# Altium PCB Audio-Streamer-Mainboard.PcbDoc
Units mil, origin at the board's own origin, x right, y up, seen from the top; angles counter-clockwise.
Board outline 6000 x 4000 mil, 2 copper layers (Top Layer, Bottom Layer); 144 components, 29 nets, 532 pads, 0 vias.
Unrouted connection lines stored in the file: 181.
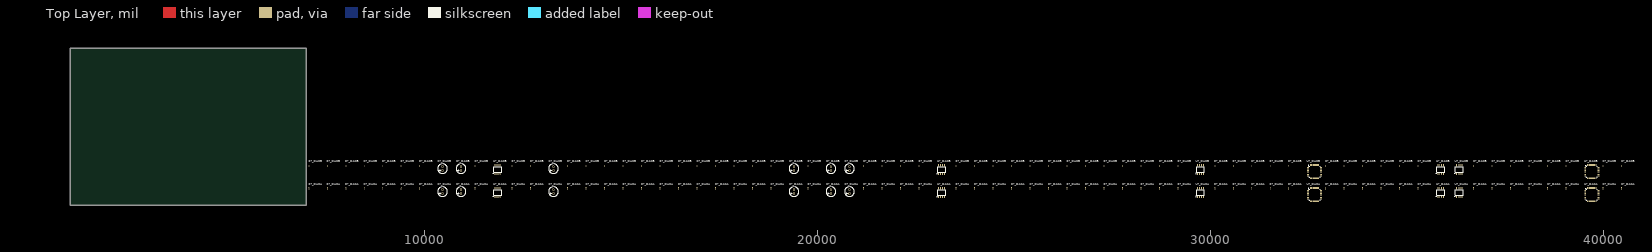
[diagram p0: Top Layer view]
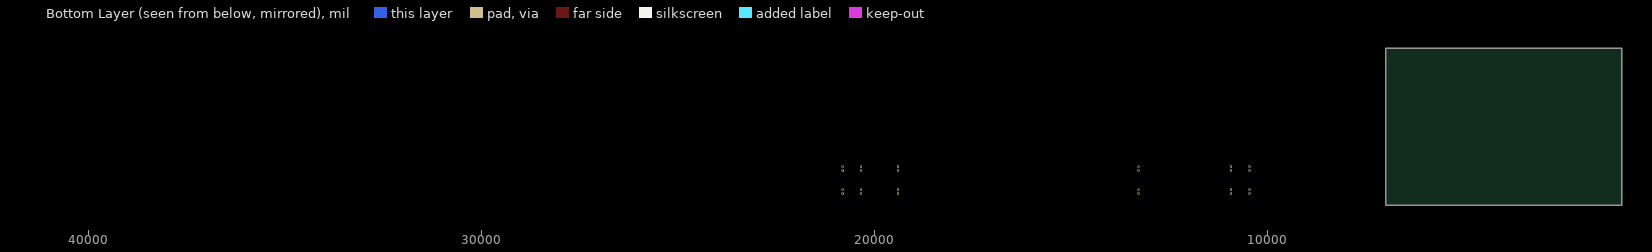
[diagram p1: Bottom Layer view, seen from below]

## Layer stack, top to bottom
Top Solder: solder mask 0.4, Solder Resist, Dk 3.5
Top Layer: signal copper 1.4
Dielectric 1: dielectric 12.6, FR-4, Dk 4.8
Bottom Layer: signal copper 1.4
Bottom Solder: solder mask 0.4, Solder Resist, Dk 3.5

## Board outline
1000,1000 7000,1000 7000,5000 1000,5000

## Design rules (kind name [scope] priority, off if disabled: settings)
Clearance [All] p1: gap=10 ignorepadtopadclearanceinfootprint=FALSE except(0: Arc-Hole Track-Hole SMDPad-Hole THPad-Hole Via-Hole Fill-Hole Poly-Hole Region-Hole Text-Hole)
PolygonConnect [All] p1: connectstyle=Relief reliefconductorwidth=10 reliefentries=4 polygonreliefangle="90 Angle" airgapwidth=10
RoomDefinition DACB [InComponentClass('DACB')] p1: confinementstyle=ConfineIn formatcopy=TRUE lockcomponents=FALSE outline 7045,1645 40855,1645 40855,2180 7045,2180
RoomDefinition DACA [InComponentClass('DACA')] p2: confinementstyle=ConfineIn formatcopy=TRUE lockcomponents=FALSE outline 7045,1060 40855,1060 40855,1595 7045,1595
RoutingVias [All] p1: holewidth=28 width=50 viastyle="Through Hole" minholewidth=28 minwidth=50 maxholewidth=28 maxwidth=50
SolderMaskExpansion [All] p1: expansion=4
Width [All] p1: maxlimit=10 minlimit=10 preferedwidth=10
30 further rules are at their usual default settings.

## Classes and differential pairs
channel class Audio-Out: DACA DACB
component class DACB: C?_DACB J?_DAC2 R?_DACB U?_DACB
component class DACA: C?_DACA J?_DAC1 R?_DACA U?_DACA

## Components (designator, comment, footprint, x,y, rotation, side; value= is the part's Value field where it differs from the comment)
C?_DACA "1µF" SMD0402CAP 39035,1440 r90 top (schematic designator C?)
C?_DACA "µF" SMD0402CAP 31045,1440 r90 top (schematic designator C?)
C?_DACA "100nF" SMD0402CAP 40445,1440 r90 top (schematic designator C?)
C?_DACA "µF" SMD0402CAP 25405,1440 r90 top (schematic designator C?)
C?_DACA "100nF" SMD0402CAP 37155,1440 r90 top (schematic designator C?)
C?_DACA "µF" SMD0402CAP 8480,1440 r90 top (schematic designator C?)
C?_DACA "µF" SMD0402CAP 16945,1440 r90 top (schematic designator C?)
C?_DACA "10µF" SMD0402CAP 37625,1440 r90 top (schematic designator C?)
C?_DACA "µF" SMD0402CAP 18825,1440 r90 top (schematic designator C?)
C?_DACA "10µF" SMD0402CAP 34805,1440 r90 top (schematic designator C?)
C?_DACA "100nF" SMD0402CAP 38095,1440 r90 top (schematic designator C?)
C?_DACA "10µF" SMD0402CAP 36685,1440 r90 top (schematic designator C?)
C?_DACA "100nF" SMD0402CAP 35275,1440 r90 top (schematic designator C?)
C?_DACA "100nF" SMD0402CAP 38565,1440 r90 top (schematic designator C?)
C?_DACA "100nF" SMD0402CAP 34335,1440 r90 top (schematic designator C?)
C?_DACA "µF" SMD0402CAP 14590,1440 r90 top (schematic designator C?)
C?_DACA "10µF" SMD0402CAP 39975,1440 r90 top (schematic designator C?)
C?_DACA "µF" SMD0402CAP 27755,1440 r90 top (schematic designator C?)
C?_DACA "100nF" SMD0402CAP 33865,1440 r90 top (schematic designator C?)
C?_DACA "100nF" SMD0402CAP 11300,1440 r90 top (schematic designator C?)
C?_DACA "µF" CAP6.3 19405,1350 r90 top (schematic designator C?)
C?_DACA "µF" CAP6.3 10470,1350 r90 top (schematic designator C?)
C?_DACA "10µF" SMD0402CAP 14120,1440 r90 top (schematic designator C?)
C?_DACA "100nF" SMD0402CAP 21175,1440 r90 top (schematic designator C?)
C?_DACA "100nF" SMD0402CAP 32925,1440 r90 top (schematic designator C?)
C?_DACA "100nF" SMD0402CAP 33395,1440 r90 top (schematic designator C?)
C?_DACA "10µF" SMD0402CAP 18355,1440 r90 top (schematic designator C?)
C?_DACA "µF" CAP6.3 13290,1350 r90 top (schematic designator C?)
C?_DACA "µF" CAP6.3 20815,1350 r90 top (schematic designator C?)
C?_DACA "µF" CAP6.3 10940,1350 r90 top (schematic designator C?)
C?_DACA "µF" CAP6.3 20345,1350 r90 top (schematic designator C?)
C?_DACB "10µF" SMD0402CAP 37625,2025 r90 top (schematic designator C?)
C?_DACB "100nF" SMD0402CAP 37155,2025 r90 top (schematic designator C?)
C?_DACB "100nF" SMD0402CAP 38095,2025 r90 top (schematic designator C?)
C?_DACB "10µF" SMD0402CAP 36685,2025 r90 top (schematic designator C?)
C?_DACB "100nF" SMD0402CAP 35275,2025 r90 top (schematic designator C?)
C?_DACB "10µF" SMD0402CAP 34805,2025 r90 top (schematic designator C?)
C?_DACB "µF" SMD0402CAP 14590,2025 r90 top (schematic designator C?)
C?_DACB "µF" SMD0402CAP 8480,2025 r90 top (schematic designator C?)
C?_DACB "µF" SMD0402CAP 16945,2025 r90 top (schematic designator C?)
C?_DACB "10µF" SMD0402CAP 39975,2025 r90 top (schematic designator C?)
C?_DACB "µF" SMD0402CAP 31045,2025 r90 top (schematic designator C?)
C?_DACB "µF" SMD0402CAP 25405,2025 r90 top (schematic designator C?)
C?_DACB "100nF" SMD0402CAP 34335,2025 r90 top (schematic designator C?)
C?_DACB "µF" SMD0402CAP 18825,2025 r90 top (schematic designator C?)
C?_DACB "100nF" SMD0402CAP 38565,2025 r90 top (schematic designator C?)
C?_DACB "100nF" SMD0402CAP 40445,2025 r90 top (schematic designator C?)
C?_DACB "µF" SMD0402CAP 27755,2025 r90 top (schematic designator C?)
C?_DACB "1µF" SMD0402CAP 39035,2025 r90 top (schematic designator C?)
C?_DACB "100nF" SMD0402CAP 32925,2025 r90 top (schematic designator C?)
C?_DACB "µF" CAP6.3 10470,1935 r90 top (schematic designator C?)
C?_DACB "100nF" SMD0402CAP 33395,2025 r90 top (schematic designator C?)
C?_DACB "µF" CAP6.3 20345,1935 r90 top (schematic designator C?)
C?_DACB "µF" CAP6.3 19405,1935 r90 top (schematic designator C?)
C?_DACB "µF" CAP6.3 13290,1935 r90 top (schematic designator C?)
C?_DACB "100nF" SMD0402CAP 11300,2025 r90 top (schematic designator C?)
C?_DACB "10µF" SMD0402CAP 18355,2025 r90 top (schematic designator C?)
C?_DACB "µF" CAP6.3 10940,1935 r90 top (schematic designator C?)
C?_DACB "µF" CAP6.3 20815,1935 r90 top (schematic designator C?)
C?_DACB "100nF" SMD0402CAP 21175,2025 r90 top (schematic designator C?)
C?_DACB "100nF" SMD0402CAP 33865,2025 r90 top (schematic designator C?)
C?_DACB "10µF" SMD0402CAP 14120,2025 r90 top (schematic designator C?)
R?_DACA "22Ω" SMD0402RES 28225,1440 r90 top (schematic designator R?)
R?_DACA "22Ω" SMD0402RES 31515,1440 r90 top (schematic designator R?)
R?_DACA "22Ω" SMD0402RES 31985,1440 r90 top (schematic designator R?)
R?_DACA "XΩ" SMD0402RES 22585,1440 r90 top (schematic designator R?)
R?_DACA "22Ω" SMD0402RES 30575,1440 r90 top (schematic designator R?)
R?_DACA "22Ω" SMD0402RES 28695,1440 r90 top (schematic designator R?)
R?_DACA "XΩ" SMD0402RES 22115,1440 r90 top (schematic designator R?)
R?_DACA "XΩ" SMD0402RES 16000,1440 r90 top (schematic designator R?)
R?_DACA "XΩ" SMD0402RES 9420,1440 r90 top (schematic designator R?)
R?_DACA "XΩ" SMD0402RES 13650,1440 r90 top (schematic designator R?)
R?_DACA "22Ω" SMD0402RES 30105,1440 r90 top (schematic designator R?)
R?_DACA "XΩ" SMD0402RES 26345,1440 r90 top (schematic designator R?)
R?_DACA "XΩ" SMD0402RES 16470,1440 r90 top (schematic designator R?)
R?_DACA "XΩ" SMD0402RES 15530,1440 r90 top (schematic designator R?)
R?_DACA "XΩ" SMD0402RES 17885,1440 r90 top (schematic designator R?)
R?_DACA "XΩ" SMD0402RES 8010,1440 r90 top (schematic designator R?)
R?_DACA "XΩ" SMD0402RES 24465,1440 r90 top (schematic designator R?)
R?_DACA "XΩ" SMD0402RES 9890,1440 r90 top (schematic designator R?)
R?_DACA "XΩ" SMD0402RES 29165,1440 r90 top (schematic designator R?)
R?_DACA "10Ω" SMD0402RES 23995,1440 r90 top (schematic designator R?)
R?_DACA "10Ω" SMD0402RES 8950,1440 r90 top (schematic designator R?)
R?_DACA "XΩ" SMD0402RES 25875,1440 r90 top (schematic designator R?)
R?_DACA "XΩ" SMD0402RES 12710,1440 r90 top (schematic designator R?)
R?_DACA "10kΩ" SMD0402RES 24935,1440 r90 top (schematic designator R?)
R?_DACA "XΩ" SMD0402RES 7070,1440 r90 top (schematic designator R?)
R?_DACA "XΩ" SMD0402RES 21645,1440 r90 top (schematic designator R?)
R?_DACA "10kΩ" SMD0402RES 27285,1440 r90 top (schematic designator R?)
R?_DACA "XΩ" SMD0402RES 12240,1440 r90 top (schematic designator R?)
R?_DACA "10kΩ" SMD0402RES 26815,1440 r90 top (schematic designator R?)
R?_DACA "XΩ" SMD0402RES 19765,1440 r90 top (schematic designator R?)
R?_DACA "10Ω" SMD0402RES 17415,1440 r90 top (schematic designator R?)
R?_DACA "XΩ" SMD0402RES 7540,1440 r90 top (schematic designator R?)
R?_DACA "10Ω" SMD0402RES 15060,1440 r90 top (schematic designator R?)
R?_DACA "10kΩ" SMD0402RES 23525,1440 r90 top (schematic designator R?)
R?_DACB "10Ω" SMD0402RES 17415,2025 r90 top (schematic designator R?)
R?_DACB "10Ω" SMD0402RES 23995,2025 r90 top (schematic designator R?)
R?_DACB "XΩ" SMD0402RES 7070,2025 r90 top (schematic designator R?)
R?_DACB "10Ω" SMD0402RES 15060,2025 r90 top (schematic designator R?)
R?_DACB "10Ω" SMD0402RES 8950,2025 r90 top (schematic designator R?)
R?_DACB "XΩ" SMD0402RES 7540,2025 r90 top (schematic designator R?)
R?_DACB "10kΩ" SMD0402RES 26815,2025 r90 top (schematic designator R?)
R?_DACB "10kΩ" SMD0402RES 27285,2025 r90 top (schematic designator R?)
R?_DACB "XΩ" SMD0402RES 19765,2025 r90 top (schematic designator R?)
R?_DACB "XΩ" SMD0402RES 16000,2025 r90 top (schematic designator R?)
R?_DACB "XΩ" SMD0402RES 22585,2025 r90 top (schematic designator R?)
R?_DACB "10kΩ" SMD0402RES 24935,2025 r90 top (schematic designator R?)
R?_DACB "22Ω" SMD0402RES 28695,2025 r90 top (schematic designator R?)
R?_DACB "XΩ" SMD0402RES 13650,2025 r90 top (schematic designator R?)
R?_DACB "22Ω" SMD0402RES 30105,2025 r90 top (schematic designator R?)
R?_DACB "XΩ" SMD0402RES 12240,2025 r90 top (schematic designator R?)
R?_DACB "22Ω" SMD0402RES 31985,2025 r90 top (schematic designator R?)
R?_DACB "XΩ" SMD0402RES 16470,2025 r90 top (schematic designator R?)
R?_DACB "22Ω" SMD0402RES 28225,2025 r90 top (schematic designator R?)
R?_DACB "XΩ" SMD0402RES 22115,2025 r90 top (schematic designator R?)
R?_DACB "XΩ" SMD0402RES 21645,2025 r90 top (schematic designator R?)
R?_DACB "XΩ" SMD0402RES 25875,2025 r90 top (schematic designator R?)
R?_DACB "10kΩ" SMD0402RES 23525,2025 r90 top (schematic designator R?)
R?_DACB "XΩ" SMD0402RES 8010,2025 r90 top (schematic designator R?)
R?_DACB "XΩ" SMD0402RES 26345,2025 r90 top (schematic designator R?)
R?_DACB "22Ω" SMD0402RES 31515,2025 r90 top (schematic designator R?)
R?_DACB "22Ω" SMD0402RES 30575,2025 r90 top (schematic designator R?)
R?_DACB "XΩ" SMD0402RES 12710,2025 r90 top (schematic designator R?)
R?_DACB "XΩ" SMD0402RES 9890,2025 r90 top (schematic designator R?)
R?_DACB "XΩ" SMD0402RES 9420,2025 r90 top (schematic designator R?)
R?_DACB "XΩ" SMD0402RES 29165,2025 r90 top (schematic designator R?)
R?_DACB "XΩ" SMD0402RES 17885,2025 r90 top (schematic designator R?)
R?_DACB "XΩ" SMD0402RES 15530,2025 r90 top (schematic designator R?)
R?_DACB "XΩ" SMD0402RES 24465,2025 r90 top (schematic designator R?)
U?_DACA "OPA1612" SOIC8 29740,1330 r90 top (schematic designator U?)
U?_DACA "OPA1611" SOIC8 36320,1330 r90 top (schematic designator U?)
U?_DACA "OPA1612" SOIC8 35850,1330 r90 top (schematic designator U?)
U?_DACA "AK4493" LQFP48 32475,1380 r0 top (schematic designator U?)
U?_DACA "AK4493" LQFP48 39525,1380 r0 top (schematic designator U?)
U?_DACA "OPA1611" SOIC8 23160,1330 r90 top (schematic designator U?)
U?_DACA "OPA1612" SOIC8 11875,1330 r90 top (schematic designator U?)
U?_DACB "OPA1612" SOIC8 35850,1915 r90 top (schematic designator U?)
U?_DACB "AK4493" LQFP48 39525,1965 r0 top (schematic designator U?)
U?_DACB "OPA1612" SOIC8 11875,1915 r90 top (schematic designator U?)
U?_DACB "OPA1611" SOIC8 36320,1915 r90 top (schematic designator U?)
U?_DACB "AK4493" LQFP48 32475,1965 r0 top (schematic designator U?)
U?_DACB "OPA1612" SOIC8 29740,1915 r90 top (schematic designator U?)
U?_DACB "OPA1611" SOIC8 23160,1915 r90 top (schematic designator U?)

## Footprints (in the part's own frame and the unit in brackets; to place one, negate y for a bottom-side part, rotate by r counter-clockwise, add the part's x,y. Pads: shape width x height; smd on the part's side, far side on the other; paste and mask are expansions set on the pad)
CAP6.3 [mm] "Aluminum Electrolytic Capacitors, 6.3x11mm"
  round 1.5 hole 0.8: M(1.25,0)
  rrect50% 1.5x1.5 hole 0.8: P(-1.25,0)
  silkscreen extent -3.15,-3.15 3.15,3.15, body extent -3.15,-3.15 3.14,3.15, height 11.31
LQFP48 [mm]
  rrect50% 1.2x0.3 smd: 1(0,0) 2(0,-0.5) 3(0,-1) 4(0,-1.5) 5(0,-2) 6(0,-2.5) 7(0,-3) 8(0,-3.5) 9(0,-4) 10(0,-4.5) 11(0,-5) 12(0,-5.5) 25(8.5,-5.5) 26(8.5,-5) 27(8.5,-4.5) 28(8.5,-4) 29(8.5,-3.5) 30(8.5,-3) 31(8.5,-2.5) 32(8.5,-2) 33(8.5,-1.5) 34(8.5,-1) 35(8.5,-0.5) 36(8.5,0)
  rrect50% 0.3x1.2 smd: 13(1.5,-7) 14(2,-7) 15(2.5,-7) 16(3,-7) 17(3.5,-7) 18(4,-7) 19(4.5,-7) 20(5,-7) 21(5.5,-7) 22(6,-7) 23(6.5,-7) 24(7,-7) 37(7,1.5) 38(6.5,1.5) 39(6,1.5) 40(5.5,1.5) 41(5,1.5) 42(4.5,1.5) 43(4,1.5) 44(3.5,1.5) 45(3,1.5) 46(2.5,1.5) 47(2,1.5) 48(1.5,1.5)
  silkscreen extent 0.2,-6.25 7.75,1.3, body extent -0.25,-7.25 8.75,1.76, height 1.5
SMD0402CAP [mm]
  rrect25% 0.5x0.6 smd: 1(-0.5,0) 2(0.5,0)
  body extent -0.5,-0.25 0.5,0.25, height 0.35
SMD0402RES [mm]
  rrect25% 0.5x0.6 smd: 1(-0.5,0) 2(0.5,0)
  body extent -0.5,-0.25 0.5,0.25, height 0.35
SOIC8 [mm] "SOIC-8"
  rrect25% 1.55x0.6 smd: 1(-2.7,1.905) 2(-2.7,0.635) 3(-2.7,-0.635) 4(-2.7,-1.905) 5(2.7,-1.905) 6(2.7,-0.635) 7(2.7,0.635) 8(2.7,1.905)
  silkscreen extent -2.79,-2.54 1.78,3, body extent -3.1,-2.5 3.1,2.5, height 1.76

## Part data
C?_DACA C?_DACA C?_DACA C?_DACA C?_DACA C?_DACA C?_DACA C?_DACA C?_DACA C?_DACA C?_DACA C?_DACA C?_DACA C?_DACA C?_DACA C?_DACA C?_DACA C?_DACA C?_DACA C?_DACA C?_DACA C?_DACA C?_DACA C?_DACA C?_DACA C?_DACB C?_DACB C?_DACB C?_DACB C?_DACB C?_DACB C?_DACB C?_DACB C?_DACB C?_DACB C?_DACB C?_DACB C?_DACB C?_DACB C?_DACB C?_DACB C?_DACB C?_DACB C?_DACB C?_DACB C?_DACB C?_DACB C?_DACB C?_DACB C?_DACB: library part "Capacitor Ceramic", "Ceramic Capacitor", Voltage=V
C?_DACA C?_DACA C?_DACA C?_DACA C?_DACA C?_DACA C?_DACB C?_DACB C?_DACB C?_DACB C?_DACB C?_DACB: library part "Capacitor Electrolytic", "Elektrolytic Capacitor"
R?_DACA R?_DACA R?_DACA R?_DACA R?_DACA R?_DACA R?_DACA R?_DACA R?_DACA R?_DACA R?_DACA R?_DACA R?_DACA R?_DACA R?_DACA R?_DACA R?_DACA R?_DACA R?_DACA R?_DACA R?_DACA R?_DACA R?_DACA R?_DACA R?_DACA R?_DACA R?_DACA R?_DACA R?_DACA R?_DACA R?_DACA R?_DACA R?_DACA R?_DACA R?_DACB R?_DACB R?_DACB R?_DACB R?_DACB R?_DACB R?_DACB R?_DACB R?_DACB R?_DACB R?_DACB R?_DACB R?_DACB R?_DACB R?_DACB R?_DACB R?_DACB R?_DACB R?_DACB R?_DACB R?_DACB R?_DACB R?_DACB R?_DACB R?_DACB R?_DACB R?_DACB R?_DACB R?_DACB R?_DACB R?_DACB R?_DACB R?_DACB R?_DACB: library part Resistor, "Resistor"
U?_DACA U?_DACA U?_DACA U?_DACA U?_DACA U?_DACB U?_DACB U?_DACB U?_DACB U?_DACB: "SoundPlus Operational Amplifier"
U?_DACA U?_DACA U?_DACB U?_DACB: "32-Bit 2ch Audio DAC"

## Nets (pads, with @x,y where several pads share a name; then routed paths per layer and width w, separated by ;. In a path a pad name is that pad's centre, name@x,y a point inside that pad or via, vN(x,y) a via of type N, cw(c..) or ccw(c..) an arc to the next point about the centre after c; other vN are vias at no path point)
A+3.3V: C?_DACA.2@36685,1459.68 C?_DACA.2@37155,1459.68 C?_DACB.2@36685,2044.68 C?_DACB.2@37155,2044.68 U?_DACA.44@39662.8,1439.06 U?_DACB.44@39662.8,2024.06
A+5V: C?_DACA.2@37625,1459.68 C?_DACA.2@38095,1459.68 C?_DACA.2@39975,1459.68 C?_DACA.2@40445,1459.68 C?_DACB.2@37625,2044.68 C?_DACB.2@38095,2044.68 C?_DACB.2@39975,2044.68 C?_DACB.2@40445,2044.68 R?_DACA.1@8950,1420.32 R?_DACA.2@23995,1459.68 R?_DACB.1@8950,2005.32 R?_DACB.2@23995,2044.68 U?_DACA.27@39859.65,1202.84 U?_DACA.28@39859.65,1222.52 U?_DACA.33@39859.65,1320.94 U?_DACA.34@39859.65,1340.63 U?_DACB.27@39859.65,1787.84 U?_DACB.28@39859.65,1807.52 U?_DACB.33@39859.65,1905.94 U?_DACB.34@39859.65,1925.63
A+12V: C?_DACA.2@32925,1459.68 C?_DACA.2@33865,1459.68 C?_DACB.2@32925,2044.68 C?_DACB.2@33865,2044.68 U?_DACA.8@35775,1436.3 U?_DACA.8@36245,1436.3 U?_DACB.8@35775,2021.3 U?_DACB.8@36245,2021.3
A-12V: C?_DACA.1@33395,1420.32 C?_DACA.1@34335,1420.32 C?_DACB.1@33395,2005.32 C?_DACB.1@34335,2005.32 U?_DACA.4@35925,1223.7 U?_DACA.4@36395,1223.7 U?_DACB.4@35925,1808.7 U?_DACB.4@36395,1808.7
AGND: C?_DACA.1@8480,1420.32 C?_DACA.1@14590,1420.32 C?_DACA.1@27755,1420.32 C?_DACA.1@32925,1420.32 C?_DACA.1@33865,1420.32 C?_DACA.1@34805,1420.32 C?_DACA.1@35275,1420.32 C?_DACA.1@36685,1420.32 C?_DACA.1@37155,1420.32 C?_DACA.1@37625,1420.32 C?_DACA.1@38095,1420.32 C?_DACA.1@38565,1420.32 C?_DACA.1@39035,1420.32 C?_DACA.1@39975,1420.32 C?_DACA.1@40445,1420.32 C?_DACA.2@33395,1459.68 C?_DACA.2@34335,1459.68 C?_DACB.1@8480,2005.32 C?_DACB.1@14590,2005.32 C?_DACB.1@27755,2005.32 C?_DACB.1@32925,2005.32 C?_DACB.1@33865,2005.32 C?_DACB.1@34805,2005.32 C?_DACB.1@35275,2005.32 C?_DACB.1@36685,2005.32 C?_DACB.1@37155,2005.32 C?_DACB.1@37625,2005.32 C?_DACB.1@38095,2005.32 C?_DACB.1@38565,2005.32 C?_DACB.1@39035,2005.32 C?_DACB.1@39975,2005.32 C?_DACB.1@40445,2005.32 C?_DACB.2@33395,2044.68 C?_DACB.2@34335,2044.68 R?_DACA.1@13650,1420.32 R?_DACA.1@15060,1420.32 R?_DACA.2@7070,1459.68 R?_DACA.2@8010,1459.68 R?_DACA.2@12240,1459.68 R?_DACA.2@12710,1459.68 R?_DACA.2@17415,1459.68 R?_DACA.2@19765,1459.68 R?_DACA.2@21645,1459.68 R?_DACA.2@23525,1459.68 R?_DACA.2@26815,1459.68 R?_DACB.1@13650,2005.32 R?_DACB.1@15060,2005.32 R?_DACB.2@7070,2044.68 R?_DACB.2@8010,2044.68 R?_DACB.2@12240,2044.68 R?_DACB.2@12710,2044.68 R?_DACB.2@17415,2044.68 R?_DACB.2@19765,2044.68 R?_DACB.2@21645,2044.68 R?_DACB.2@23525,2044.68 R?_DACB.2@26815,2044.68 U?_DACA.6@32475,1281.58 U?_DACA.7@32475,1261.89 U?_DACA.13@32534.06,1104.41 U?_DACA.15@32573.43,1104.41 U?_DACA.24@32750.59,1104.41 U?_DACA.29@39859.65,1242.2 U?_DACA.30@39859.65,1261.89 U?_DACA.31@39859.65,1281.58 U?_DACA.32@39859.65,1301.26 U?_DACA.37@32750.59,1439.06 U?_DACA.43@32632.48,1439.06 U?_DACA.45@39643.11,1439.06 U?_DACA.47@39603.74,1439.06 U?_DACB.6@32475,1866.58 U?_DACB.7@32475,1846.89 U?_DACB.13@32534.06,1689.41 U?_DACB.15@32573.43,1689.41 U?_DACB.24@32750.59,1689.41 U?_DACB.29@39859.65,1827.2 U?_DACB.30@39859.65,1846.89 U?_DACB.31@39859.65,1866.58 U?_DACB.32@39859.65,1886.26 U?_DACB.37@32750.59,2024.06 U?_DACB.43@32632.48,2024.06 U?_DACB.45@39643.11,2024.06 U?_DACB.47@39603.74,2024.06
AOUT_DACA_N: C?_DACA.1@31045,1420.32 R?_DACA.1@15530,1420.32 R?_DACA.1@17885,1420.32 R?_DACA.2@29165,1459.68
AOUT_DACA_P: C?_DACA.1@16945,1420.32 R?_DACA.1@9420,1420.32 R?_DACA.1@24465,1420.32 R?_DACA.2@9890,1459.68
AOUT_DACB_N: C?_DACB.1@31045,2005.32 R?_DACB.1@15530,2005.32 R?_DACB.1@17885,2005.32 R?_DACB.2@29165,2044.68
AOUT_DACB_P: C?_DACB.1@16945,2005.32 R?_DACB.1@9420,2005.32 R?_DACB.1@24465,2005.32 R?_DACB.2@9890,2044.68
D+3.3V: C?_DACA.2@34805,1459.68 C?_DACA.2@35275,1459.68 C?_DACB.2@34805,2044.68 C?_DACB.2@35275,2044.68 R?_DACA.2@24935,1459.68 R?_DACA.2@27285,1459.68 R?_DACB.2@24935,2044.68 R?_DACB.2@27285,2044.68 U?_DACA.14@32553.74,1104.41 U?_DACA.16@32593.11,1104.41 U?_DACA.48@39584.06,1439.06 U?_DACB.14@32553.74,1689.41 U?_DACB.16@32593.11,1689.41 U?_DACB.48@39584.06,2024.06
LDO+1.8V_DACA: C?_DACA.2@38565,1459.68 C?_DACA.2@39035,1459.68 U?_DACA.1@39525,1380
LDO+1.8V_DACB: C?_DACB.2@38565,2044.68 C?_DACB.2@39035,2044.68 U?_DACB.1@39525,1965
LP_DACA_N: C?_DACA.2@31045,1459.68 R?_DACA.1@25875,1420.32 R?_DACA.2@22115,1459.68 U?_DACA.1@29665,1223.7
LP_DACA_P: C?_DACA.2@16945,1459.68 R?_DACA.1@7540,1420.32 R?_DACA.2@16000,1459.68 U?_DACA.7@11850,1436.3
LP_DACB_N: C?_DACB.2@31045,2044.68 R?_DACB.1@25875,2005.32 R?_DACB.2@22115,2044.68 U?_DACB.1@29665,1808.7
LP_DACB_P: C?_DACB.2@16945,2044.68 R?_DACB.1@7540,2005.32 R?_DACB.2@16000,2044.68 U?_DACB.7@11850,2021.3
NetC?_DACA_1: C?_DACA.1@11300,1420.32 C?_DACA.P@10470,1300.79 R?_DACA.2@8950,1459.68 U?_DACA.41@32671.85,1439.06 U?_DACA.42@32652.17,1439.06
NetC?_DACA_2: C?_DACA.2@25405,1459.68 R?_DACA.2@22585,1459.68 U?_DACA.2@23135,1223.7
NetC?_DACA_M: C?_DACA.M@20345,1399.21 R?_DACA.1@19765,1420.32 R?_DACA.2@24465,1459.68
NetC?_DACA_P: C?_DACA.P@10940,1300.79 U?_DACA.36@32809.65,1380
NetC?_DACB_1: C?_DACB.1@25405,2005.32 R?_DACB.1@26345,2005.32 U?_DACB.6@23185,2021.3
NetC?_DACB_2: C?_DACB.2@14590,2044.68 R?_DACB.2@16470,2044.68 U?_DACB.3@23185,1808.7
NetC?_DACB_M: C?_DACB.M@19405,1984.21 R?_DACB.1@12710,2005.32 R?_DACB.2@17885,2044.68
NetC?_DACB_P: C?_DACB.P@19405,1885.79 U?_DACB.26@32809.65,1768.15
NetR?_DACA_1: R?_DACA.1@23525,1420.32 R?_DACA.1@24935,1420.32 U?_DACA.17@32612.8,1104.41
NetR?_DACA_2: R?_DACA.2@30105,1459.68
NetR?_DACB_1: R?_DACB.1@7070,2005.32 R?_DACB.2@7540,2044.68 U?_DACB.6@11900,2021.3
NetR?_DACB_2: R?_DACB.2@31515,2044.68
NetU?_DACA_2: U?_DACA.2@32475,1360.32 U?_DACB.2@32475,1945.32
pads on no net: C?_DACA.1@14120,1420.32 C?_DACA.1@18355,1420.32 C?_DACA.1@18825,1420.32 C?_DACA.1@21175,1420.32 C?_DACA.1@25405,1420.32 C?_DACA.2@8480,1459.68 C?_DACA.2@11300,1459.68 C?_DACA.2@14120,1459.68 C?_DACA.2@14590,1459.68 C?_DACA.2@18355,1459.68 C?_DACA.2@18825,1459.68 C?_DACA.2@21175,1459.68 C?_DACA.2@27755,1459.68 C?_DACA.M@10470,1399.21 C?_DACA.M@10940,1399.21 C?_DACA.M@13290,1399.21 C?_DACA.M@19405,1399.21 C?_DACA.M@20815,1399.21 C?_DACA.P@13290,1300.79 C?_DACA.P@19405,1300.79 C?_DACA.P@20345,1300.79 C?_DACA.P@20815,1300.79 C?_DACB.1@11300,2005.32 C?_DACB.1@14120,2005.32 C?_DACB.1@18355,2005.32 C?_DACB.1@18825,2005.32 C?_DACB.1@21175,2005.32 C?_DACB.2@8480,2044.68 C?_DACB.2@11300,2044.68 C?_DACB.2@14120,2044.68 C?_DACB.2@18355,2044.68 C?_DACB.2@18825,2044.68 C?_DACB.2@21175,2044.68 C?_DACB.2@25405,2044.68 C?_DACB.2@27755,2044.68 C?_DACB.M@10470,1984.21 C?_DACB.M@10940,1984.21 C?_DACB.M@13290,1984.21 C?_DACB.M@20345,1984.21 C?_DACB.M@20815,1984.21 C?_DACB.P@10470,1885.79 C?_DACB.P@10940,1885.79 C?_DACB.P@13290,1885.79 C?_DACB.P@20345,1885.79 C?_DACB.P@20815,1885.79 R?_DACA.1@7070,1420.32 R?_DACA.1@8010,1420.32 R?_DACA.1@9890,1420.32 R?_DACA.1@12240,1420.32 R?_DACA.1@12710,1420.32 R?_DACA.1@16000,1420.32 R?_DACA.1@16470,1420.32 R?_DACA.1@17415,1420.32 R?_DACA.1@21645,1420.32 R?_DACA.1@22115,1420.32 R?_DACA.1@22585,1420.32 R?_DACA.1@23995,1420.32 R?_DACA.1@26345,1420.32 R?_DACA.1@26815,1420.32 R?_DACA.1@27285,1420.32 R?_DACA.1@28225,1420.32 R?_DACA.1@28695,1420.32 R?_DACA.1@29165,1420.32 R?_DACA.1@30105,1420.32 R?_DACA.1@30575,1420.32 R?_DACA.1@31515,1420.32 R?_DACA.1@31985,1420.32 R?_DACA.2@7540,1459.68 R?_DACA.2@9420,1459.68 R?_DACA.2@13650,1459.68 R?_DACA.2@15060,1459.68 R?_DACA.2@15530,1459.68 R?_DACA.2@16470,1459.68 R?_DACA.2@17885,1459.68 R?_DACA.2@25875,1459.68 R?_DACA.2@26345,1459.68 R?_DACA.2@28225,1459.68 R?_DACA.2@28695,1459.68 R?_DACA.2@30575,1459.68 R?_DACA.2@31515,1459.68 R?_DACA.2@31985,1459.68 R?_DACB.1@8010,2005.32 R?_DACB.1@9890,2005.32 R?_DACB.1@12240,2005.32 R?_DACB.1@16000,2005.32 R?_DACB.1@16470,2005.32 R?_DACB.1@17415,2005.32 R?_DACB.1@19765,2005.32 R?_DACB.1@21645,2005.32 R?_DACB.1@22115,2005.32 R?_DACB.1@22585,2005.32 R?_DACB.1@23525,2005.32 R?_DACB.1@23995,2005.32 R?_DACB.1@24935,2005.32 R?_DACB.1@26815,2005.32 R?_DACB.1@27285,2005.32 R?_DACB.1@28225,2005.32 R?_DACB.1@28695,2005.32 R?_DACB.1@29165,2005.32 R?_DACB.1@30105,2005.32 R?_DACB.1@30575,2005.32 R?_DACB.1@31515,2005.32 R?_DACB.1@31985,2005.32 R?_DACB.2@8950,2044.68 R?_DACB.2@9420,2044.68 R?_DACB.2@13650,2044.68 R?_DACB.2@15060,2044.68 R?_DACB.2@15530,2044.68 R?_DACB.2@22585,2044.68 R?_DACB.2@24465,2044.68 R?_DACB.2@25875,2044.68 R?_DACB.2@26345,2044.68 R?_DACB.2@28225,2044.68 R?_DACB.2@28695,2044.68 R?_DACB.2@30105,2044.68 R?_DACB.2@30575,2044.68 R?_DACB.2@31985,2044.68 U?_DACA.1@11800,1223.7 U?_DACA.1@23085,1223.7 U?_DACA.1@32475,1380 U?_DACA.1@35775,1223.7 U?_DACA.1@36245,1223.7 U?_DACA.2@11850,1223.7 U?_DACA.2@29715,1223.7 U?_DACA.2@35825,1223.7 U?_DACA.2@36295,1223.7 U?_DACA.2@39525,1360.32 U?_DACA.3 U?_DACA.4@11950,1223.7 U?_DACA.4@23235,1223.7 U?_DACA.4@29815,1223.7 U?_DACA.4@32475,1320.94 U?_DACA.4@39525,1320.94 U?_DACA.5 U?_DACA.6@11900,1436.3 U?_DACA.6@23185,1436.3 U?_DACA.6@29765,1436.3 U?_DACA.6@35875,1436.3 U?_DACA.6@36345,1436.3 U?_DACA.6@39525,1281.58 U?_DACA.7@23135,1436.3 U?_DACA.7@29715,1436.3 U?_DACA.7@35825,1436.3 U?_DACA.7@36295,1436.3 U?_DACA.7@39525,1261.89 U?_DACA.8@11800,1436.3 U?_DACA.8@23085,1436.3 U?_DACA.8@29665,1436.3 U?_DACA.8@32475,1242.2 U?_DACA.8@39525,1242.2 U?_DACA.9 U?_DACA.10 U?_DACA.11 U?_DACA.12 U?_DACA.13@39584.06,1104.41 U?_DACA.14@39603.74,1104.41 U?_DACA.15@39623.43,1104.41 U?_DACA.16@39643.11,1104.41 U?_DACA.17@39662.8,1104.41 U?_DACA.18 U?_DACA.19 U?_DACA.20 U?_DACA.21 U?_DACA.22 U?_DACA.23 U?_DACA.24@39800.59,1104.41 U?_DACA.25 U?_DACA.26 U?_DACA.27@32809.65,1202.84 U?_DACA.28@32809.65,1222.52 U?_DACA.29@32809.65,1242.2 U?_DACA.30@32809.65,1261.89 U?_DACA.31@32809.65,1281.58 U?_DACA.32@32809.65,1301.26 U?_DACA.33@32809.65,1320.94 U?_DACA.34@32809.65,1340.63 U?_DACA.35 U?_DACA.36@39859.65,1380 U?_DACA.37@39800.59,1439.06 U?_DACA.38 U?_DACA.39 U?_DACA.40 U?_DACA.41@39721.85,1439.06 U?_DACA.42@39702.17,1439.06 U?_DACA.43@39682.48,1439.06 U?_DACA.44@32612.8,1439.06 U?_DACA.45@32593.11,1439.06 U?_DACA.46 U?_DACA.47@32553.74,1439.06 U?_DACA.48@32534.06,1439.06 U?_DACB.1@11800,1808.7 U?_DACB.1@23085,1808.7 U?_DACB.1@32475,1965 U?_DACB.1@35775,1808.7 U?_DACB.1@36245,1808.7 U?_DACB.2@11850,1808.7 U?_DACB.2@23135,1808.7 U?_DACB.2@29715,1808.7 U?_DACB.2@35825,1808.7 U?_DACB.2@36295,1808.7 U?_DACB.2@39525,1945.32 U?_DACB.3@11900,1808.7 U?_DACB.3@29765,1808.7 U?_DACB.3@32475,1925.63 U?_DACB.3@35875,1808.7 U?_DACB.3@36345,1808.7 U?_DACB.3@39525,1925.63 U?_DACB.4@11950,1808.7 U?_DACB.4@23235,1808.7 U?_DACB.4@29815,1808.7 U?_DACB.4@32475,1905.94 U?_DACB.4@39525,1905.94 U?_DACB.5 U?_DACB.6@29765,2021.3 U?_DACB.6@35875,2021.3 U?_DACB.6@36345,2021.3 U?_DACB.6@39525,1866.58 U?_DACB.7@23135,2021.3 U?_DACB.7@29715,2021.3 U?_DACB.7@35825,2021.3 U?_DACB.7@36295,2021.3 U?_DACB.7@39525,1846.89 U?_DACB.8@11800,2021.3 U?_DACB.8@23085,2021.3 U?_DACB.8@29665,2021.3 U?_DACB.8@32475,1827.2 U?_DACB.8@39525,1827.2 U?_DACB.9 U?_DACB.10 U?_DACB.11 U?_DACB.12 U?_DACB.13@39584.06,1689.41 U?_DACB.14@39603.74,1689.41 U?_DACB.15@39623.43,1689.41 U?_DACB.16@39643.11,1689.41 U?_DACB.17 U?_DACB.18 U?_DACB.19 U?_DACB.20 U?_DACB.21 U?_DACB.22 U?_DACB.23 U?_DACB.24@39800.59,1689.41 U?_DACB.25 U?_DACB.26@39859.65,1768.15 U?_DACB.27@32809.65,1787.84 U?_DACB.28@32809.65,1807.52 U?_DACB.29@32809.65,1827.2 U?_DACB.30@32809.65,1846.89 U?_DACB.31@32809.65,1866.58 U?_DACB.32@32809.65,1886.26 U?_DACB.33@32809.65,1905.94 U?_DACB.34@32809.65,1925.63 U?_DACB.35 U?_DACB.36 U?_DACB.37@39800.59,2024.06 U?_DACB.38 U?_DACB.39 U?_DACB.40 U?_DACB.41 U?_DACB.42 U?_DACB.43@39682.48,2024.06 U?_DACB.44@32612.8,2024.06 U?_DACB.45@32593.11,2024.06 U?_DACB.46 U?_DACB.47@32553.74,2024.06 U?_DACB.48@32534.06,2024.06